# EAGLE board PatGenV3 (EAGLE 9.6.2)
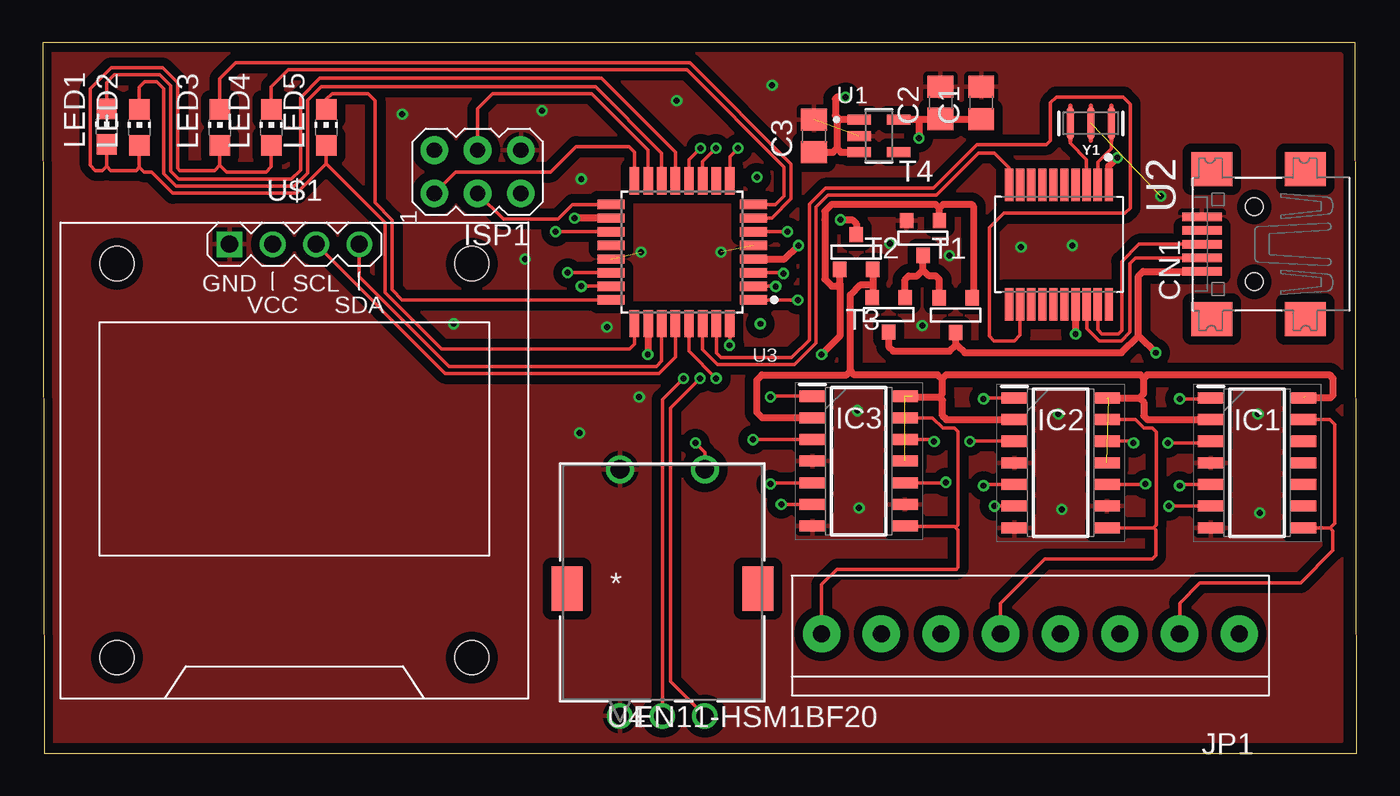
[diagram p0: board, top side]
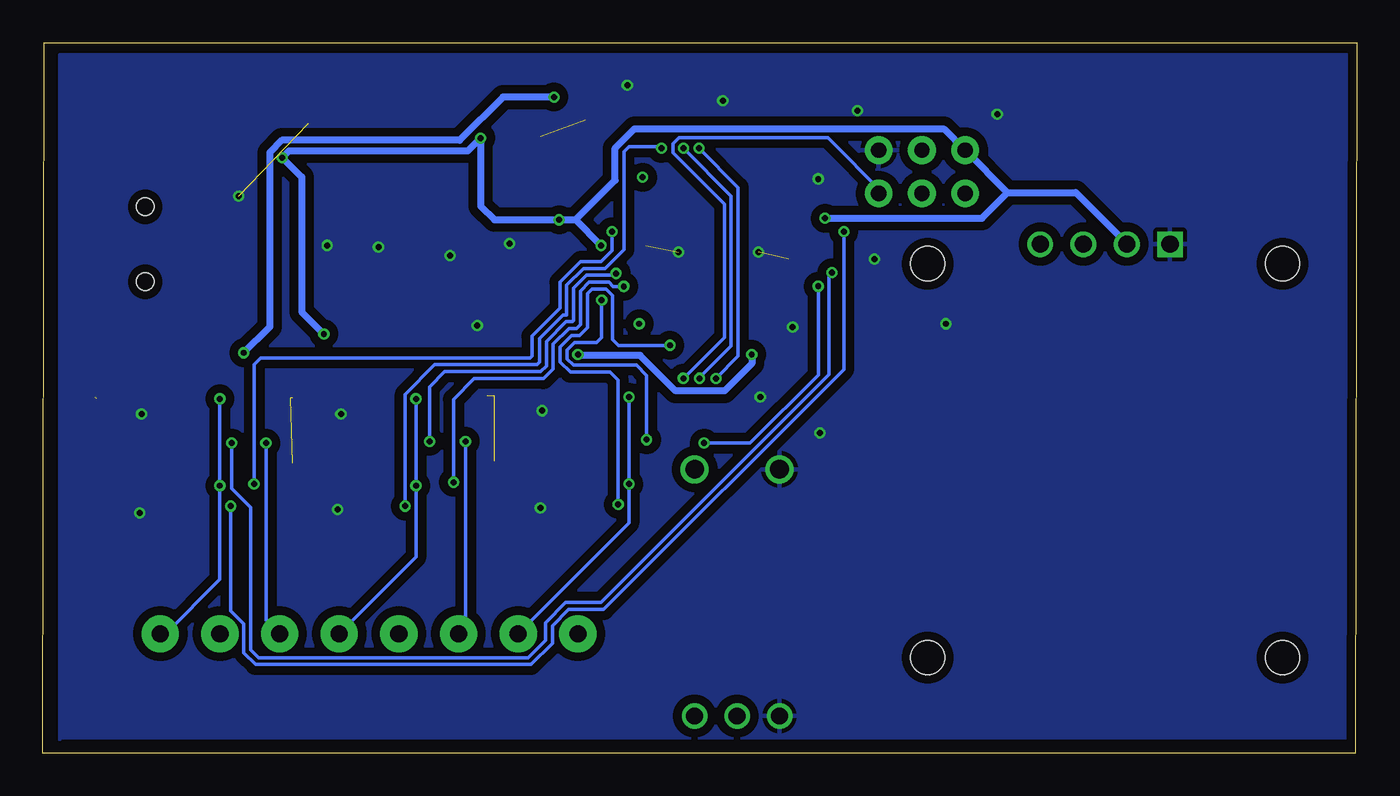
[diagram p1: board, bottom side, seen from below]

Size 77.1 x 41.7 mm. Coordinates in mm from the lower left corner, seen from the top.
Outline: 0.1,0 77.1,0 77,41.7 0,41.7 0.1,0
Copper layers (1*16): Top 0.035mm / dielectric 1.5mm / Bottom 0.035mm
Design rules "Dirty8TS": minimum track width 5mil, minimum drill 12mil, track to track 8mil, track to pad 8mil, pad to pad 8mil, via to via 8mil, smd to smd 0mil, copper to edge 10mil, drill to drill 10mil, minimum pad ring 10mil, minimum via ring 6mil, stop-mask expansion 2mil, vias tented up to drill 25mil, thermal gap 10mil

## Footprints (pad centres in the part's own frame; a part is rotated, then mirrored left to right if it is on the bottom)
C0805 = smd 1.3 x 1.5: 1 -0.95,0; 2 0.95,0
USB-MINIB = smd 0.5 x 2.308: D+ 0,4.064; D- -0.8,4.064; GND 1.6,4.064; ID 0.8,4.064; VBUS -1.6,4.064 | smd 2 x 2.4: GND1 -4.4,-2; GND2 -4.4,3.5; GND3 4.4,3.5; GND4 4.4,-2 | hole 1: -2.2,1; 2.2,1
SOIC127P600X175-14N = smd 1.525 x 0.65: 1 -2.712,3.81; 2 -2.712,2.54; 3 -2.712,1.27; 4 -2.712,0; 5 -2.712,-1.27; 6 -2.712,-2.54; 7 -2.712,-3.81; 8 2.712,-3.81; 9 2.712,-2.54; 10 2.712,-1.27; 11 2.712,0; 12 2.712,1.27; 13 2.712,2.54; 14 2.712,3.81
AVRISP = drill 0.9 pad 1.626: 1 -1.27,2.54; 2 1.27,2.54; 3 -1.27,0; 4 1.27,0; 5 -1.27,-2.54; 6 1.27,-2.54
1X08-3.5MM = drill 1 pad 2.184: 1 -12.25,0; 2 -8.75,0; 3 -5.25,0; 4 -1.75,0; 5 1.75,0; 6 5.25,0; 7 8.75,0; 8 12.25,0
CHIP-LED0805 = smd 1.2 x 1.2: A 0,-1.05; C 0,1.05
SOT-23 = smd 0.787 x 0.889: 1 0.025,-1.016; 2 -0.94,1.016; 3 0.991,1.016
SOT95P280X145-5N = smd 1.39 x 0.58: 1 -1.165,0.95; 2 -1.165,0; 3 -1.165,-0.95; 4 1.165,-0.95; 5 1.165,0.95
SOP65P780X200-20N = smd 1.9 x 0.48: 1 -3.505,2.925; 2 -3.505,2.275; 3 -3.505,1.625; 4 -3.505,0.975; 5 -3.505,0.325; 6 -3.505,-0.325; 7 -3.505,-0.975; 8 -3.505,-1.625; 9 -3.505,-2.275; 10 -3.505,-2.925; 11 3.505,-2.925; 12 3.505,-2.275; 13 3.505,-1.625; 14 3.505,-0.975; 15 3.505,-0.325; 16 3.505,0.325; 17 3.505,0.975; 18 3.505,1.625; 19 3.505,2.275; 20 3.505,2.925
QFP80P900X900X120-32N = smd 1.6 x 0.55: 1 -4.18,2.8; 2 -4.18,2; 3 -4.18,1.2; 4 -4.18,0.4; 5 -4.18,-0.4; 6 -4.18,-1.2; 7 -4.18,-2; 8 -4.18,-2.8; 17 4.18,-2.8; 18 4.18,-2; 19 4.18,-1.2; 20 4.18,-0.4; 21 4.18,0.4; 22 4.18,1.2; 23 4.18,2; 24 4.18,2.8 | smd 0.55 x 1.6: 9 -2.8,-4.18; 10 -2,-4.18; 11 -1.2,-4.18; 12 -0.4,-4.18; 13 0.4,-4.18; 14 1.2,-4.18; 15 2,-4.18; 16 2.8,-4.18; 25 2.8,4.18; 26 2,4.18; 27 1.2,4.18; 28 0.4,4.18; 29 -0.4,4.18; 30 -1.2,4.18; 31 -2,4.18; 32 -2.8,4.18
EN11-HSM_TTE = drill 0.991 pad 1.499: 1 -2.489,7.874; 2 2.489,7.874; 3 0,7.874 | drill 1.092 pad 1.6: 4 -2.489,22.352; 5 2.489,22.352 | smd 1.803 x 2.591: 6 -5.601,15.354; 7 5.601,15.354
DISPLAY-OLED-128X64-I2C = drill 1 square: 1 -3.81,12.7 | drill 1: 2 -1.27,12.7; 3 1.27,12.7; 4 3.81,12.7 | hole 2: -10.414,11.557; 10.414,11.557; 10.414,-11.557; -10.414,-11.557
RESONATOR-SMD-3.2X1.3 = smd 0.45 x 1.905: 1 -1.2,0; 2 0,0; 3 1.2,0

## Placement (x,y rotation side)
C1  1u  [C0805]  55.06,38.16 90 top
C2  1u  [C0805]  52.67,38.17 90 top
C3  1u  [C0805]  45.25,36.22 90 top
CN1  [USB-MINIB]  72.08,29.87 90 top
IC1  CD4007UBM  [SOIC127P600X175-14N]  71.25,17.04 0 top
IC2  CD4007UBM  [SOIC127P600X175-14N]  59.72,17.04 0 top
IC3  CD4007UBM  [SOIC127P600X175-14N]  47.88,17.14 0 top
ISP1  AVRISP-6  [AVRISP]  25.52,34.12 90 top
JP1  [1X08-3.5MM]  57.95,7.01 0 top
LED1  [CHIP-LED0805]  3.76,36.77 0 top
LED2  [CHIP-LED0805]  5.68,36.72 0 top
LED3  [CHIP-LED0805]  10.4,36.72 0 top
LED4  [CHIP-LED0805]  13.42,36.72 0 top
LED5  [CHIP-LED0805]  16.64,36.72 0 top
T1  [SOT-23]  53.54,25.71 0 top
T2  [SOT-23]  49.6,25.73 0 top
T3  [SOT-23]  47.76,29.41 180 top
T4  [SOT-23]  51.62,30.23 0 top
U1  MIC5504-3.3YM5-T5  [SOT95P280X145-5N]  49.06,36.22 0 top
U2  MCP2200-I/SS  [SOP65P780X200-20N]  59.62,29.85 270 top
U3  ATMEGA328PB-AU  [QFP80P900X900X120-32N]  37.52,29.4 180 top
U4  EN11-HSM1BF20  [EN11-HSM_TTE]  36.36,-5.69 0 top
U$1  DISPLAY-OLED-128X64-I2C  [DISPLAY-OLED-128X64-I2C]  14.77,17.17 0 top
Y1  12MHz  [RESONATOR-SMD-3.2X1.3]  61.49,36.97 180 top

## Library data of the parts
C1-C3 = rcl; SPICEPREFIX: C
CN1 ISP1 JP1 = adafruit
IC1-IC3 = CD4007UBM; ARROW_PART_NUMBER: CD4007UBM; ARROW_PRICE-STOCK: https://www.arrow.com/en/products/cd4007ubm/texas-instruments; DESCRIPTION: Texas Instruments CD4007UBM Inverter, 3 18 V, 14-Pin SOIC; HEIGHT: 1.75mm; MANUFACTURER_NAME: Texas Instruments; MANUFACTURER_PART_NUMBER: CD4007UBM; MOUSER_PART_NUMBER: 595-CD4007UBM; MOUSER_PRICE-STOCK: https://www.mouser.co.uk/ProductDetail/Texas-Instruments/CD4007UBM?qs=LfG3tU9ud8BhOMkMTdqqtw%3D%3D
LED1-LED5 = led
T1-T4 = zetex; OC_FARNELL: unknown; OC_NEWARK: unknown
U1 = MIC5504-3.3YM5-T5; AVAILABILITY: Good; DESCRIPTION: Linear Voltage Regulator IC 1 Output 300mA SOT-23-5; MF: Microchip; MP: MIC5504-3.3YM5-T5; PACKAGE: SOT-23-5 Microchip; PRICE: None; PURCHASE-URL: https://pricing.snapeda.com/search/part/MIC5504-3.3YM5-T5/?ref=eda
U2 = MCP2200-I_SS; AVAILABILITY: Good; DESCRIPTION: USB Bridge, USB to UART USB 2.0 UART Interface 20-SSOP; MF: Microchip; MP: MCP2200-I/SS; PACKAGE: SSOP-20 Microchip; PRICE: None; PURCHASE-URL: https://pricing.snapeda.com/search/part/MCP2200-I/SS/?ref=eda
U3 = ATMEGA328PB-AU; AVAILABILITY: Good; DESCRIPTION: 8-bit Microcontrollers - MCU ATMEGA328PB 20MHZ IND TEMP; MF: Microchip Technology / Atmel; MP: ATMEGA328PB-AU; PACKAGE: None; PRICE: None; PURCHASE-URL: https://pricing.snapeda.com/search/part/ATMEGA328PB-AU/?ref=eda
U4 = EN11-HSM1BF20; MANUFACTURER_PART_NUMBER: EN11-HSM1BF20; SOURCELIBRARY: TTELECTRONICS_2018-05-01A; VENDOR: TT Electronics
U$1 = diy-modules
Y1 = SparkFun-Clocks; PROD_ID: XTAL-08900

## Nets
0: C1.2 C2.2 C3.2 CN1.GND IC1.4 IC1.7 IC2.4 IC2.7 IC2.9 IC3.4 IC3.7 IC3.9 ISP1.6 T4.2 U1.2 U3.5 U3.21 U4.1 U4.4 U$1.1 Y1.2
+5V: C3.1 CN1.VBUS T1.1 T2.1 U1.1 U1.3
C1: IC3.8 IC3.13 JP1.1
C2: IC3.1 IC3.5 JP1.2
C3: IC3.12 JP1.3
C4: IC2.8 IC2.13 JP1.4
C5: IC2.1 IC2.5 JP1.5
C6: IC2.12 JP1.6
C7: IC1.8 IC1.13 JP1.7
C8: IC1.1 IC1.5 JP1.8
CLK: U3.12 U4.3
D+: CN1.D+ U2.19
D-: CN1.D- U2.18
DT: U3.23 U4.5
LC: IC1.2 IC1.14 IC2.2 IC2.11 IC2.14 IC3.2 IC3.11 IC3.14 T2.2 T3.2
LC1: IC3.6 U3.32
LC2: IC3.3 U3.1
LC3: IC3.10 U3.2
LC4: IC2.6 U3.9
LC5: IC2.3 U3.3
LC6: IC2.10 U3.6
LC7: IC1.6 U3.19
LC8: IC1.3 U3.22
LED1: LED1.C U3.13
LED2: LED2.C U3.14
LED3: LED3.C U3.7
LED4: LED4.C U3.8
LED5: LED5.C U3.24
LEDA: LED1.A LED2.A LED3.A LED4.A LED5.A U3.25
MISO: ISP1.1 U3.16
MOSI: ISP1.4 U3.15
N$1: IC1.9
N$2: IC1.10
N$3: IC1.11
N$4: U3.10
N$5: IC1.12
N$6: U2.2 Y1.1
N$8: CN1.ID
N$9: T1.2 T2.3 T4.1
N$14: U2.3 Y1.3
N$30: U3.20
RST: ISP1.5 U3.29
RX/TX: U2.10 U3.30
SCK: ISP1.3 U3.17
SCL: U3.28 U$1.3
SDA: U3.27 U$1.4
SW: U3.11 U4.2
TX/RX: U2.12 U3.31
VCC: C1.1 C2.1 ISP1.2 T3.1 U1.5 U2.1 U2.17 U3.4 U3.18 U$1.2
VSET: T1.3 T3.3 T4.3 U3.26
VSS: U2.20

## Tracks (layer width: path | path; a pad name or v marks a point on that pad's centre or on a via)
0  (via drill 0.35)  (4 unrouted)
  other vias: 29.3,37.7 21.1,37.5 37.2,38.3 42.8,39.2 65.6,32.7 60.4,29.8 57.4,29.7 71.3,19.9 71.4,14.1 59.8,14.3 59.6,19.9 47.8,20.1 47.9,14.4 31.5,18.8 35,20.9 35.1,29.4 39.8,29.4 28.3,29 24.1,25.2 33.1,25 51.6,25.1 53.2,29.2 49.7,29.9 31.6,33.7
  pour Bottom (isolate 0.508): 0.6,41 0.6,0.9 76,0.9 76.1,0.8 76.1,41
  pour Top (isolate 0.508): 0.5,41.1 0.5,0.8 0.6,0.7 76.2,0.7 76.2,41 76.1,41.1
+5V  (via drill 0.35)
  Top 0.406: U1.1 46.77,37.17 | 46.77,37.17 46.6,37 46.6,35.5 | U1.3 46.83,35.27 46.6,35.5 | C3.1 46.37,35.27 46.6,35.5 | T2.1 49.62,23.88 49.9,23.6 53.2,23.6 53.56,23.96 | 53.56,23.96 T1.1 | 53.56,23.96 53.63,23.96 54.1,23.5 63.29,23.5 64.28,24.49 | 64.28,24.49 64.28,28 64.56,28.27 CN1.VBUS | 64.28,24.49 64.31,24.49 v65.3,23.5 | v47.1,38.5 46.6,38.5 46.5,38.4 46.5,37.44 46.77,37.17
  Bottom 0.406: v65.3,23.5 63.78,25.02 63.78,35.26 63.07,35.96 52.64,35.96 50.1,38.5 v47.1,38.5
C1
  Top 0.203: IC3.8 50.62,13.3 53.5,13.3 53.55,13.25 | 53.55,13.25 53.7,13.1 53.7,10.9 53.6,10.8 46.6,10.8 45.7,9.9 JP1.1 | IC3.13 52.2,19.68 52.81,19.07 53.5,19.07 53.7,18.87 53.7,13.4 53.55,13.25
C2  (via drill 0.35)
  Top 0.203: IC3.1 42.75,20.95 v42.7,20.9 | IC3.5 42.77,15.87 v42.7,15.8
  Bottom 0.203: v42.7,20.9 v42.7,15.8 42.7,13.51 JP1.2
C3  (via drill 0.35)
  Top 0.203: IC3.12 52.19,18.41 v52.3,18.3
  Bottom 0.203: v52.3,18.3 52.3,7.41 JP1.3
C4
  Top 0.203: JP1.4 56.2,8.8 58.8,11.4 65.1,11.4 65.3,11.6 65.3,13.1 65.17,13.23 | 65.17,13.23 IC2.8 | IC2.13 64.1,19.58 64.61,19.07 65.1,19.07 65.33,18.84 65.33,13.39 65.17,13.23
C5  (via drill 0.35)
  Top 0.203: IC2.1 55.25,20.85 v55.2,20.8 | IC2.5 55.27,15.77 v55.2,15.7
  Bottom 0.203: v55.2,20.8 v55.2,15.7 55.2,11.51 JP1.5
C6  (via drill 0.35)
  Top 0.203: IC2.12 63.89,18.31 v64,18.2
  Bottom 0.203: v64,18.2 64,7.81 JP1.6
C7
  Top 0.203: IC1.13 75.52,19.58 75.8,19.3 75.8,13.5 75.53,13.23 | IC1.8 75.53,13.23 | 75.53,13.23 75.7,13.06 75.7,11.9 73.8,10 67.9,10 66.7,8.8 JP1.7
C8  (via drill 0.35)
  Top 0.203: IC1.1 68.49,20.8 v66.7,20.8 | IC1.5 66.77,15.77 v66.7,15.7
  Bottom 0.203: v66.7,20.8 v66.7,15.7 66.7,10.2 69.89,7.01 JP1.8
CLK  (via drill 0.35)
  Top 0.203: U3.12 37.92,34.82 v38.6,35.5 | U4.3 36.36,20.76 v37.6,22
  Bottom 0.203: v38.6,35.5 v38.59,35.5 36.3,33.2 36.3,23.3 v37.6,22
D+
  Top 0.203: CN1.D+ 64.32,29.87 63.3,28.85 63.3,24.8 63.1,24.6 62.15,24.6 61.89,24.86 U2.19
D-
  Top 0.203: CN1.D- 64.12,29.07 63.78,28.73 63.78,24.7 63.27,24.19 61.98,24.19 61.24,24.93 U2.18
DT  (via drill 0.35)
  Top 0.203: U3.23 v31.6,27.4 | v38.3,18.2 38.85,17.65 U4.5
  Bottom 0.203: v38.3,18.2 35.6,18.2 31.6,22.2 v31.6,27.4
LC  (5 unrouted)
  Top 0.203: 48.7,26.79 T2.2
  Top 0.406: T3.2 48.7,27.5 | 48.7,27.5 48.7,26.79 | 51.03,20.95 51.08,20.9 52.6,20.9 | 52.6,20.9 52.75,21.05 52.75,21.95 | 48.7,27.5 47.98,27.5 47.38,26.9 47.38,22.42 | 52.6,20.9 52.8,20.7 52.8,19.8 53.02,19.58 IC2.2 | 62.56,20.85 64.35,20.85 | 64.35,20.85 64.6,20.6 64.6,19.8 64.82,19.58 IC1.2 | 64.35,20.85 64.6,21.1 64.6,22 | 64.6,22 64.4,22.2 53,22.2 52.75,21.95 | 74.04,20.9 73.99,20.85 75.55,20.85 75.7,21 75.7,22 75.5,22.2 64.8,22.2 64.6,22 | 52.75,21.95 52.5,22.2 47.6,22.2 47.38,22.42 | 47.38,22.42 47.16,22.2 42.2,22.2 41.9,21.9 41.9,20 42.22,19.68 IC3.2
LC1  (via drill 0.35)
  Top 0.203: U3.32 40.32,23.96 v40.3,23.94 | v43.33,14.6 IC3.6
  Bottom 0.203: v40.3,23.94 43.32,23.94 43.67,24.29 43.67,26.86 44.04,27.23 44.86,27.23 45.13,26.96 45.13,24.97 45.6,24.51 46.06,24.51 46.74,23.83 46.74,22.97 46.13,22.36 43.8,22.36 43.33,21.89 v43.33,14.6
LC2  (via drill 0.35)
  Top 0.203: IC3.3 v41.68,18.41 v41.67,18.4 | v44.3,26.6 U3.1
  Bottom 0.203: v41.67,18.4 41.67,22.16 42.27,22.77 45.96,22.77 46.33,23.14 46.33,23.66 45.89,24.1 44.6,24.1 44.3,24.4 v44.3,26.6
LC3  (via drill 0.35)
  Top 0.203: U3.2 v43,27.4 v43.01,27.39 | IC3.10 52.97,15.87 v53,15.9
  Bottom 0.203: v43.01,27.39 43.62,27.39 43.87,27.64 45.03,27.64 45.54,27.13 45.54,25.14 45.77,24.91 46.23,24.91 47.14,24 47.14,22.56 47.72,21.98 51.78,21.98 53,20.77 v53,15.9
LC4  (via drill 0.35)
  Top 0.203: U3.9 40.32,35.02 v40.8,35.5 | IC2.6 v55.83,14.5
  Bottom 0.203: v55.83,14.5 55.83,21.06 54.1,22.8 48.1,22.8 47.96,22.94 47.96,24.33 46.57,25.73 46.35,25.73 46.35,27.47 45.37,28.45 44.1,28.45 43,29.55 43,35.3 42.7,35.6 40.9,35.6 v40.8,35.5
LC5  (via drill 0.35)
  Top 0.203: U3.3 43.41,28.2 v43.46,28.16 | IC2.3 v54.41,18.31 v54.4,18.3
  Bottom 0.203: v43.46,28.16 43.57,28.04 45.2,28.04 45.95,27.3 45.95,25.4 46.03,25.32 46.4,25.32 47.55,24.17 47.55,22.72 47.88,22.39 53.51,22.39 54.4,21.5 v54.4,18.3
LC6  (via drill 0.35)
  Top 0.203: U3.6 v43.7,30.6 | IC2.10 64.67,15.77 v64.7,15.8
  Bottom 0.203: v43.7,30.6 43.7,29.5 44.34,28.86 45.53,28.86 46.76,27.64 46.76,26.11 48.4,24.47 48.4,23.3 48.5,23.2 64.3,23.2 64.7,22.8 v64.7,15.8
LC7  (via drill 0.35)
  Top 0.203: U3.19 v30.1,30.6 | IC1.6 v66.07,14.5
  Bottom 0.203: v30.1,30.6 30.1,22.52 44.18,8.44 46.25,8.44 47.2,7.49 47.2,6.46 48.45,5.21 64.61,5.21 65.3,5.9 65.3,7.59 66.07,8.35 v66.07,14.5
LC8  (via drill 0.35)
  Top 0.203: U3.22 v30.8,28.2 | v66,18.2 68.43,18.2 IC1.3
  Bottom 0.203: v30.8,28.2 30.97,28.03 30.97,22.23 44.35,8.84 46.42,8.84 47.6,7.66 47.6,6.63 48.62,5.61 64.44,5.61 64.9,6.07 64.9,14.42 66,15.53 v66,18.2 65.93,18.27
LED1
  Top 0.203: LED1.C 3.76,39.36 4.21,39.81 6.87,39.81 7.51,39.17 7.51,34.17 7.99,33.69 14.59,33.69 15.13,34.22 15.13,38.48 16.27,39.61 32.79,39.61 37.12,35.28 U3.13
LED2
  Top 0.203: U3.14 36.32,35.21 32.42,39.11 16.33,39.11 15.54,38.31 15.54,34.05 14.75,33.27 7.83,33.27 7.1,34 7.1,39 6.7,39.4 6,39.4 5.68,39.08 LED2.C
LED3
  Top 0.203: U3.7 42.77,31.4 43.91,32.53 43.91,34.57 37.97,40.51 11.34,40.51 10.4,39.57 LED3.C
LED4
  Top 0.203: LED4.C 13.42,39.12 14.4,40.1 37.8,40.1 43.5,34.4 43.5,32.7 43,32.2 U3.8
LED5
  Top 0.203: LED5.C 16.64,38.37 16.97,38.7 19.1,38.7 19.5,38.3 19.5,32.3 20.51,31.29 20.51,27.19 21.1,26.6 U3.24
LEDA
  Top 0.203: LED1.A 3.76,34.46 | LED3.A 10.4,34.5 | LED4.A 13.42,34.42 13.1,34.1 10.8,34.1 10.4,34.5 | 10.4,34.5 10.09,34.19 8.06,34.19 7.91,34.34 7.91,39.34 7.04,40.21 4.01,40.21 2.8,39 2.8,34.5 3.1,34.2 3.5,34.2 3.76,34.46 | LED2.A 5.68,34.38 | 3.76,34.46 3.76,34.44 4,34.2 5.5,34.2 5.68,34.38 | 5.68,34.38 5.96,34.1 6.39,34.1 7.63,32.86 14.92,32.86 16.64,34.58 | LED5.A 16.64,34.58 | U3.25 34.72,24 34.44,23.72 23.41,23.72 20.1,27.03 20.1,31.12 16.64,34.58
MISO
  Top 0.203: ISP1.1 24.23,34.1 29.8,34.1 31.3,35.6 34.4,35.6 34.72,35.28 U3.16
MOSI
  Top 0.203: ISP1.4 25.52,37.82 26.4,38.7 32.2,38.7 35.52,35.38 U3.15
N$6
  Top 0.203: U2.2 61.89,34.7 62.69,35.49 Y1.1
N$9
  Top 0.406: T1.2 | T1.2 52.6,27.8 52.4,28 52,28 51.64,28.36 | 51.64,28.36 T4.1 | T2.3 50.59,27.79 50.8,28 51.29,28 51.64,28.36
N$12  (via drill 0.35)
  other vias: 42.1,25.2
N$13  (via drill 0.35)
  other vias: 41.9,33.8
N$14
  Top 0.203: Y1.3 60.29,35.79 61.24,34.84 U2.3
RST  (via drill 0.35)
  Top 0.203: U3.29 37.92,23.59 v39.51,22
  Bottom 0.203: ISP1.5 27.76,32.85 31.04,36.13 39.76,36.13 40.13,35.76 40.13,35.24 37.11,32.22 37.11,24.4 v39.51,22
RX/TX
  Top 0.203: U2.10 56.7,34.36 55.82,35.22 54.91,35.22 52.42,32.74 46.08,32.74 45.38,32.04 45.38,24.07 44.1,22.8 39.6,22.8 38.72,23.68 U3.30
SCK
  Top 0.203: U3.17 31.09,32.2 30.22,31.33 27.04,31.33 ISP1.3
SCL
  Top 0.203: U$1.3 23.62,22.29 36.17,22.29 37.12,23.25 U3.28
SDA
  Top 0.203: U$1.4 18.58,27.97 23.85,22.7 36,22.7 36.32,23.02 U3.27
SW  (via drill 0.35)
  Top 0.203: U3.11 38.72,34.72 v39.5,35.5 | U4.2 36.82,4.21 36.82,20.27 v38.55,22
  Bottom 0.203: v38.55,22 38.55,22.03 36.7,23.88 36.7,32.7 v39.5,35.5
TX/RX
  Top 0.203: U2.12 57.34,24.54 57,24.2 55.8,24.2 55.53,24.47 55.53,30.83 56.4,31.7 63.5,31.7 63.8,32 63.8,38.1 63.4,38.5 59.46,38.5 59.13,38.17 59.13,35.96 58.89,35.71 54.82,35.71 52.26,33.15 45.91,33.15 44.97,32.21 44.97,24.24 43.93,23.21 39.8,23.21 39.52,23.49 U3.31
VCC  (via drill 0.35)
  Top 0.406: 51.4,37.17 52.62,37.17 C2.1 C1.1 | 51.4,37.17 U1.5 | U3.4 43.53,29 v44.33,29.8 | v46.8,31.3 47.5,31.3 47.73,31.07 T3.1 | 51.4,37.17 v51.4,36.1 | U2.1 62.54,34.45 v63.05,34.95 | U2.17 v60.59,24.61 v60.6,24.6 | U3.18 v31.2,31.4
  Bottom 0.406: v44.33,29.8 45.83,31.3 | 45.83,31.3 v46.8,31.3 50.6,31.3 51.4,32.1 v51.4,36.1 52.15,35.35 62.65,35.35 v63.05,34.95 61.9,33.81 61.9,25.9 v60.6,24.6 | 20.49,32.9 ISP1.2 24.24,36.64 42.38,36.64 43.51,35.51 43.51,33.62 45.83,31.3 | 20.49,32.9 16.5,32.9 13.5,29.9 U$1.2 | v31.2,31.4 21.99,31.4 20.49,32.9
VSET  (via drill 0.35)
  Top 0.406: T4.3 52.61,31.99 | 52.61,31.99 52.4,32.2 46.29,32.2 45.89,31.8 45.89,31.3 45.89,27.81 46.3,27.4 46.6,27.4 46.77,27.57 | 46.77,27.57 T3.3 | T1.3 54.59,26.79 54.59,32.11 54.5,32.2 52.82,32.2 52.61,31.99 | U3.26 35.52,23.42 v35.5,23.4 | 46.77,27.57 46.77,24.47 v45.7,23.4
  Bottom 0.406: v35.5,23.4 35.5,22.86 37.09,21.26 39.96,21.26 42.05,23.35 45.65,23.35 v45.7,23.4